# Altium PCB PCB_PB.pcbdoc
Units mil, origin at the board's own origin, x right, y up, seen from the top; angles counter-clockwise.
Board outline 2293.49 x 1790.24 mil, 2 copper layers (Top Layer, Bottom Layer); 45 components, 37 nets, 182 pads, 122 vias.
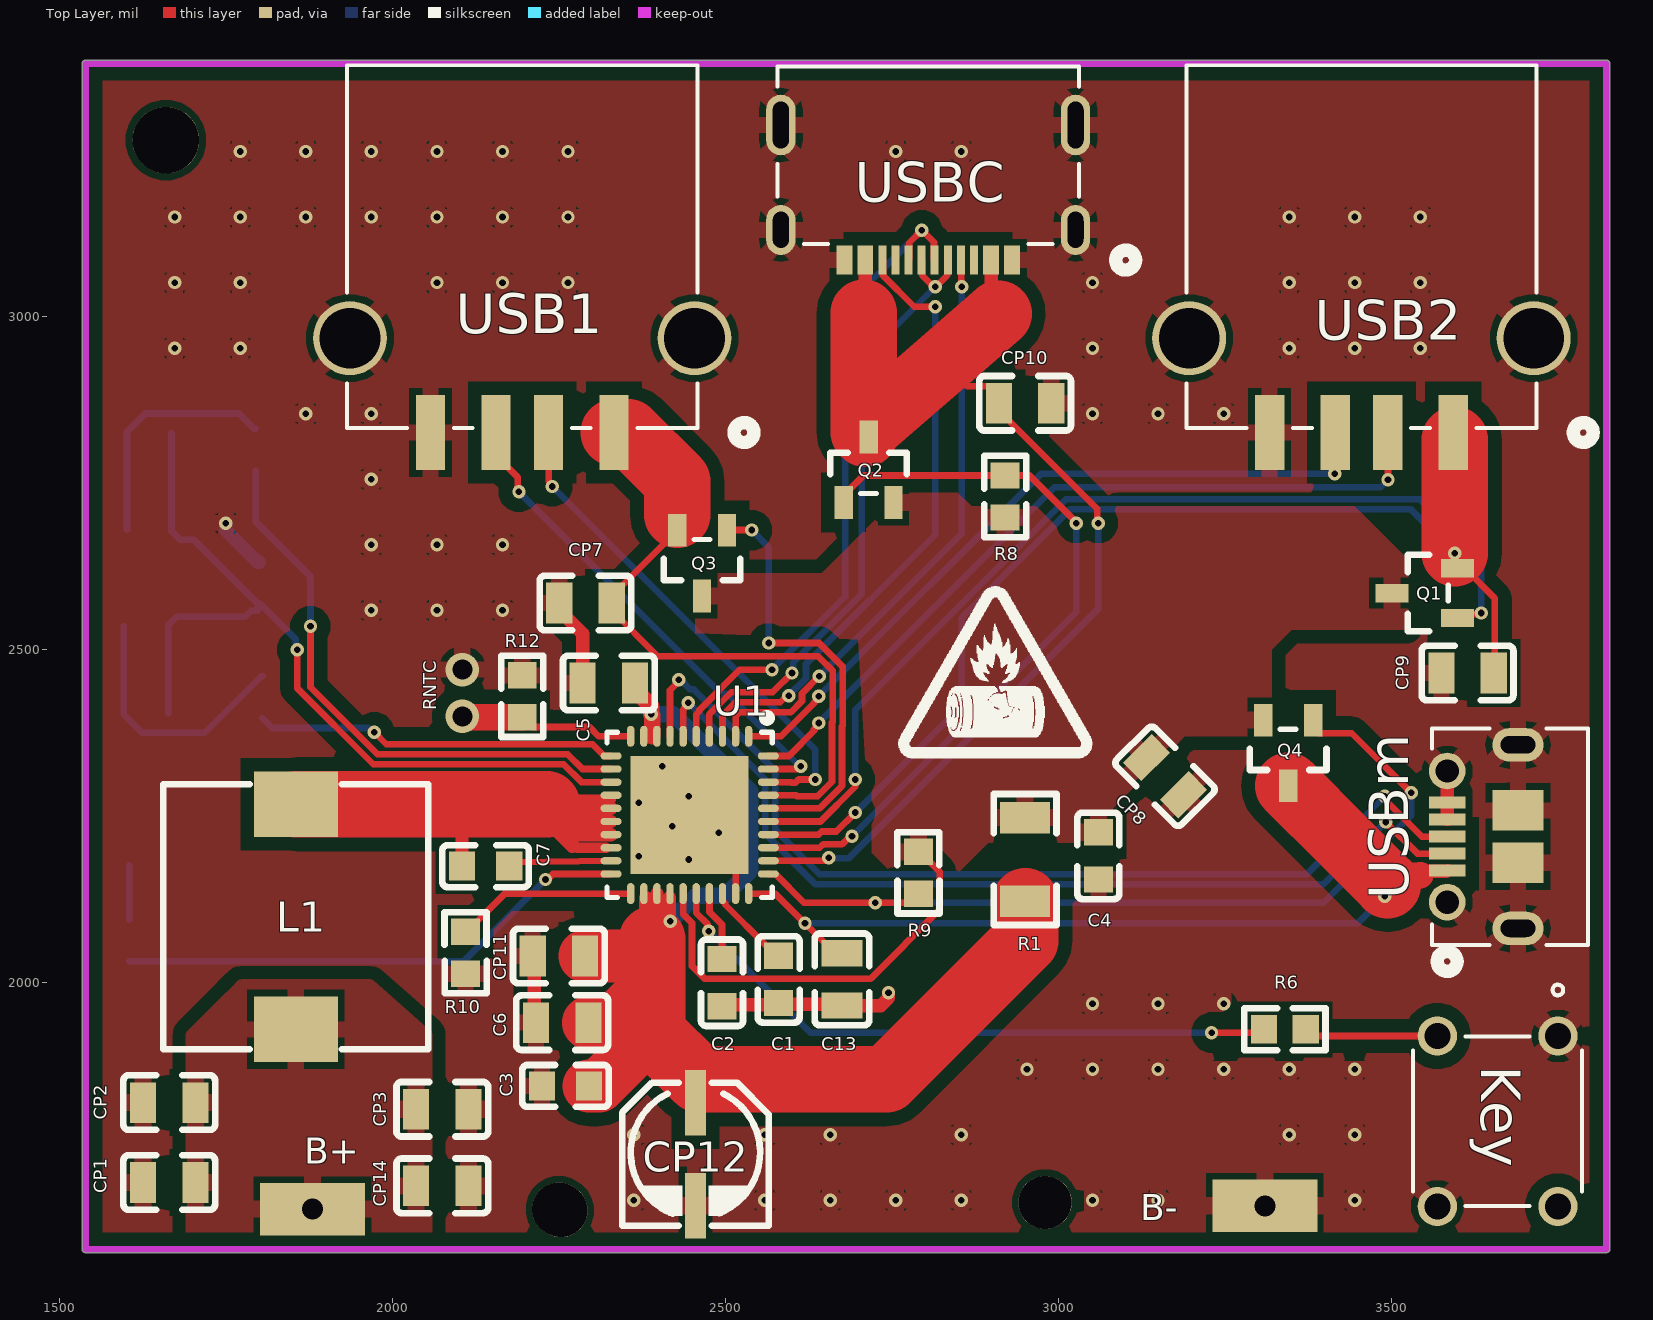
[diagram p0: Top Layer view]
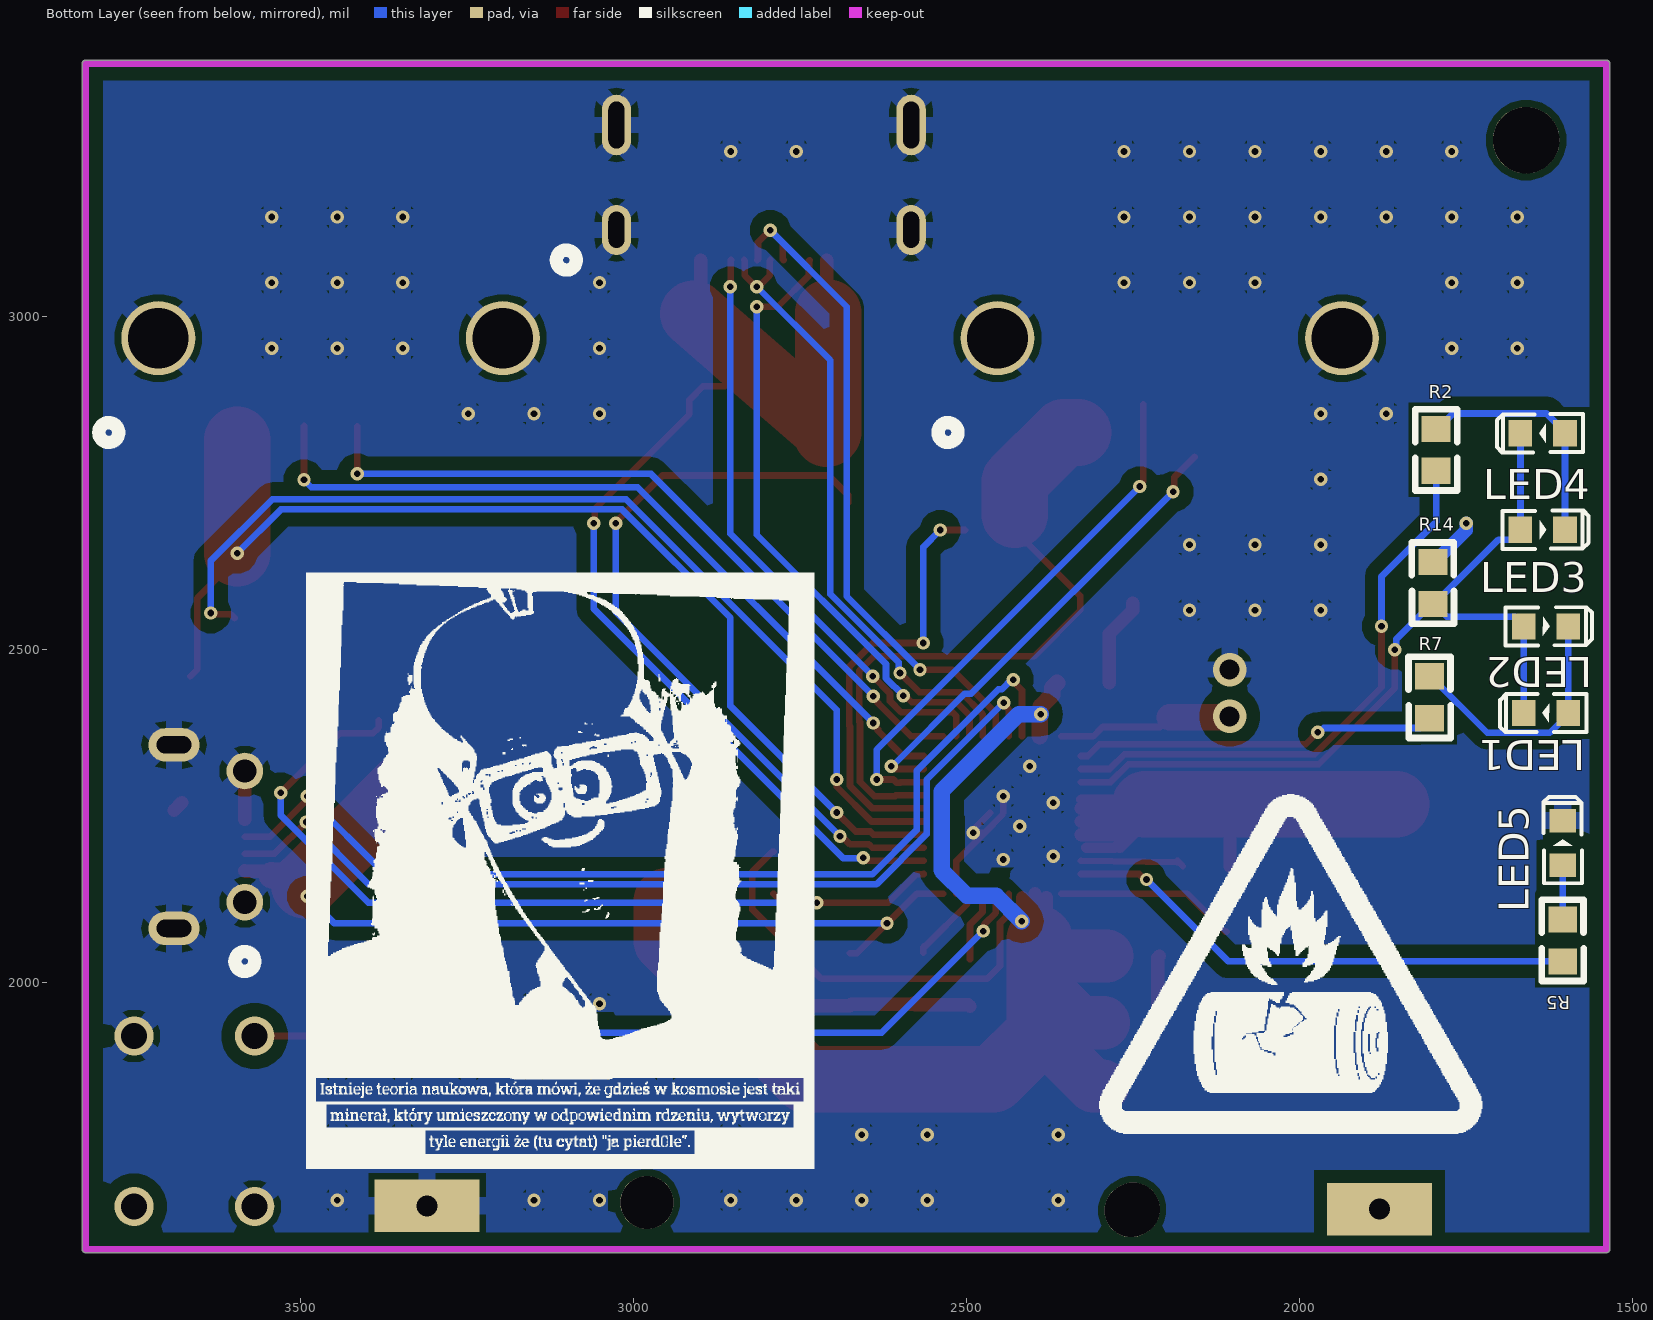
[diagram p1: Bottom Layer view, seen from below]

## Layer stack, top to bottom
Top Solder: solder mask 0.4, Solder Resist, Dk 3.5
Top Layer: signal copper 1.4
Dielectric1: dielectric 12.6, FR-4, Dk 4.8
Bottom Layer: signal copper 1.4
Bottom Solder: solder mask 0.4, Solder Resist, Dk 3.5

## Board outline
1539.37,1594.79 cw(c1539.37,1599.81) 1534.36,1599.81 1534.36,3380 cw(c1539.37,3380) 1539.37,3385.01 2004.03,3385.01 2004.45,3385.03 3822.83,3385 cw(c3822.83,3379.99) 3827.84,3379.99 3827.85,2603.72 3827.85,1599.81 cw(c3822.84,1599.81) 3822.84,1594.79

## Design rules (kind name [scope] priority, off if disabled: settings)
Clearance [All] p1: gap=5 ignorepadtopadclearanceinfootprint=FALSE except(10: Arc-Hole Track-Hole SMDPad-Hole THPad-Hole Via-Hole Fill-Hole Poly-Hole Region-Hole Text-Hole; 20: Arc-Poly Track-Poly SMDPad-Poly THPad-Poly Via-Poly Fill-Poly Poly-Poly)
ComponentClearance [All] p1: gap=10 collisioncheckmode=3 verticalgap=10 showdistances=FALSE donotcheckwithout3dbody=TRUE
MinimumSolderMaskSliver [OnLayer('Top Layer')] p1 off: minsoldermaskwidth=0
NetAntennae [InNet('GND')] p1: netantennaetolerance=0
PolygonConnect [All] p1: connectstyle=Relief reliefconductorwidth=25 reliefentries=4 polygonreliefangle="90 Angle" conductorbypadedge=TRUE mindistance=5 enablemindistance=TRUE airgapwidth=10
RoutingVias [All] p1: holewidth=28 width=50 viastyle="Through Hole" minholewidth=10 minwidth=10 maxholewidth=28 maxwidth=50
SilkToSilkClearance [All] p1: silktosilkclearance=2
SilkToSolderMaskClearance [IsPad] p1: minsilkscreentomaskgap=0 clearancetoexposedcopper=TRUE
SolderMaskExpansion [All] p1: expansion=4 istentingtop=FALSE
Width [All] p1: maxlimit=100 minlimit=10 preferedwidth=40 minimp=50.000000 maximp=50.000000 favimp=50.000000
25 further rules are at their usual default settings.

## Components (designator, comment, footprint, x,y, rotation, side; value= is the part's Value field where it differs from the comment)
C1 "2.2u/16V" C0603 2580,2005 r270 top
C2 "2.2u/16V" C0603 2495,2000 r270 top
C3 "100n/25V" C0603 2260,1845 r0 top
C4 "100n/25V" C0603 3060,2190.43 r270 top
C5 "22u/25V" C0805 2325,2450 r0 top
C6 "22u/25V" C0805 2255,1940 r0 top
C7 "100n/25V" C0603 2140,2175 r0 top
C13 "10uF/25V" C0805 2675,2005 r270 top
CP1 "22u/16V" C0805 1665,1700 r180 top
CP2 "22u/16V" C0805 1665,1820 r180 top
CP3 "22u/16V" C0805 2075,1810 r0 top
CP7 "10uF/25V" C0805 2290,2570 r180 top
CP8 "22u/25V" C0805 3160,2310 r315 top
CP9 "10uF/25V" C0805 3614.37,2465 r180 top
CP10 "10uF/25V" C0805 2950,2870 r180 top
CP11 "22u/25V" C0805 2250,2040 r0 top
CP12 "220u/25V" ?#1 2455,1665 r90 top
CP14 "22u/16V" C0805 2075,1695 r0 top
Key "Comment" TO_6050726_WRE 3750,1920 r270 top
L1 "2.2uH" INDUCTOR_SLF10145 1855,2099 r180 top
LED1 "LED-0603_B" LED0603_BLUE 1630,2405 r180 bottom
LED2 "LED-0603_B" LED0603_BLUE 1630,2535 r0 bottom
LED3 "LED-0603_B" LED0603_BLUE 1635,2680 r0 bottom
LED4 "LED-0603_B" LED0603_BLUE 1635,2825 r180 bottom
LED5 "LED-0603_G" LED0603_GREEN 1605,2210 r270 bottom
Q1 "RU207C" SOT-23-3_L2.9-W1.6-P1.90-LS2.8-BR 3550,2585 r0 top
Q2 "RU20P7C" SOT-23-3_L2.9-W1.3-P1.90-LS2.4-BR 2715,2770 r270 top
Q3 "RU207C" SOT-23-3_L2.9-W1.6-P1.90-LS2.8-BR 2465,2630 r90 top
Q4 "RU20P7C" SOT-23-3_L2.9-W1.3-P1.90-LS2.4-BR 3345,2345 r90 top
R1 "0.01R" R1206 2950,2185 r90 top
R2 "100R" R0603 1795,2800 r270 bottom
R5 "100R" R0603 1605,2063.51 r90 bottom
R6 "1k" R0603 3340,1930 r0 top
R7 "100R" R0603 1805,2428.51 r270 bottom
R8 "10k" R0603 2920,2730 r270 top
R9 "10K" R0603 2790,2165 r90 top
R10 "114K" R0603 2109.8,2045 r270 top
R12 "82k" R0603 2195,2430 r270 top
R14 "--" R0603 1800,2600 r270 bottom
U1 "IP5328P" QFN-40_L6.0-W6.0-P0.50-BL-EP 2446.42,2251.89 r180 top
USB1 "Comment" CONN4_DS1095-BNM0_CFL#1 2195,3105 r180 top
USB2 "Comment" CONN4_DS1095-BNM0_CFL#2 3455,3105 r180 top
USBC "Comment" CONN12_USB4520-03-0-A_GCT 2804.49,3242.43 r180 top
USBm "Comment" CONN_1050170001_MOL 3677.98,2219.37 r90 top
? "" ?#2 2680,1430 r0 top

## Footprints (in the part's own frame and the unit in brackets; to place one, negate y for a bottom-side part, rotate by r counter-clockwise, add the part's x,y. Pads: shape width x height; smd on the part's side, far side on the other; paste and mask are expansions set on the pad)
C0603 [mm]
  rect 1x1.1 smd paste+0 mask+0.102: 1(-0.9,0) 2(0.9,0)
  silkscreen extent -1.65,-0.8 1.65,0.8
C0805 [mm]
  rect 1x1.55 smd paste+0 mask+0.102: 1(-1,0) 2(1,0)
  silkscreen extent -1.75,-1.04 1.75,1.04
CONN4_DS1095-BNM0_CFL#1 [mil]
  rect 44x113 smd paste+0 mask+4: 1(-137.8,278.96) 2(-39.37,278.96) 4(137.8,278.96)
  rect 44x113 smd paste-56.5 mask+4: 3(39.37,278.96)
  round 111 / inner round 60 / far side round 111 hole 91 paste-99999 mask-55.5: 5(-258.66,137.22) 6(258.66,137.22)
  silkscreen extent -348,-273 263,294
CONN4_DS1095-BNM0_CFL#2 [mil]
  rect 44x113 smd paste+0 mask+4: 1(-137.8,278.96) 2(-39.37,278.96) 3(39.37,278.96) 4(137.8,278.96)
  round 111 / inner round 60 / far side round 111 hole 91 paste-99999 mask-55.5: 5(-258.66,137.22) 6(258.66,137.22)
  silkscreen extent -348,-273 263,294
CONN12_USB4520-03-0-A_GCT [mil]
  rect 24x43 smd paste+0 mask+2: 1(-125.98,157.43) 2(-94.49,157.43) 11(94.49,157.43) 12(125.98,157.43)
  rect 12x43 smd paste+0 mask+2: 3(-68.9,157.43) 4(-49.21,157.43) 5(-29.53,157.43) 6(-9.84,157.43) 7(9.84,157.43) 8(29.53,157.43) 9(49.21,157.43) 10(68.9,157.43)
  oval 44x75 / inner round 60 / far side oval 44x75 hole 24 slot 50 at 90 deg paste-99999 mask+0: 13(-221.26,112.15)
  oval 44x75 hole 24 slot 53 at 90 deg paste-99999 mask+0: 14(221.26,112.15)
  oval 44x91 / inner round 60 / far side oval 44x91 hole 24 slot 70 at 90 deg paste-99999 mask+0: 15(-221.26,-45.33) 16(221.26,-45.33)
  round 24 / inner round 60 / far side round 24 hole 24 unplated paste-99999 mask-12: 17(-221.26,127.65) 18(-221.26,96.65) 19(221.26,127.65) 20(221.26,96.65) 21(-221.26,-21.83) 22(-221.26,-68.83) 23(221.26,-21.83) 24(221.26,-68.83)
  Multi-Layer lines w24: 221.26,127.65 221.26,96.65 ; 221.26,-21.83 221.26,-68.83 ; -221.26,127.65 -221.26,96.65 ; -221.26,-21.83 -221.26,-68.83
  silkscreen extent -312,-133 227,172
CONN_1050170001_MOL [mil]
  rect 18x55 smd paste+0 mask+0: 1(-51.18,94.28) 2(-25.59,94.28) 3(0,94.28) 4(25.59,94.28) 5(51.18,94.28)
  rect 61x77 smd paste+0 mask+4: 6(-39.37,-12.02) 7(39.37,-12.02)
  round 55 / inner round 60 / far side round 55 hole 35 paste-99999 mask+0: 8(-98.43,94.28) 9(98.43,94.28)
  oval 50x77 / inner round 60 / far side oval 50x77 hole 26 slot 50 at 90 deg paste-99999 mask+0: S_1(-137.8,-12.02) S_2(137.8,-12.02)
  round 26 / inner round 60 / far side round 26 hole 26 unplated paste-99999 mask-13: S_1_H1(-137.8,1.48) S_1_H2(-137.8,-25.52) S_2_H1(137.8,1.48) S_2_H2(137.8,-25.52)
  Multi-Layer lines w26: -137.8,1.48 -137.8,-25.52 ; 137.8,1.48 137.8,-25.52
  silkscreen extent -202,-117 162,117
INDUCTOR_SLF10145 [mil]
  rect 126x98.4 smd paste+0 mask+4: 1(0,169) 2(0,-169)
  silkscreen extent -199,-199 199,199
LED0603_BLUE [mm]
  rect 0.9x1 smd paste+0 mask+0.102: 1(0.85,0) 2(-0.85,0)
  silkscreen extent -1.75,-0.73 1.54,0.73
LED0603_GREEN [mm]
  rect 0.9x1 smd paste+0 mask+0.102: 1(0.85,0) 2(-0.85,0)
  silkscreen extent -1.75,-0.73 1.54,0.73
QFN-40_L6.0-W6.0-P0.50-BL-EP [mm]
  oval 0.28x0.8 smd paste+0 mask+0.102: 1(-2.25,-3) 2(-1.75,-3) 3(-1.25,-3) 4(-0.75,-3) 5(-0.25,-3) 6(0.25,-3) 7(0.75,-3) 8(1.25,-3) 9(1.75,-3) 10(2.25,-3) 21(2.25,3) 22(1.75,3) 23(1.25,3) 25(0.25,3) 26(-0.25,3) 27(-0.75,3) 28(-1.25,3) 29(-1.75,3) 30(-2.25,3)
  oval 0.8x0.28 smd paste+0 mask+0.102: 11(3,-2.25) 12(3,-1.75) 13(3,-1.25) 14(3,-0.75) 15(3,-0.25) 16(3,0.25) 17(3,0.75) 18(3,1.25) 19(3,1.75) 20(3,2.25) 31(-3,2.25) 32(-3,1.75) 33(-3,1.25) 34(-3,0.75) 35(-3,0.25) 36(-3,-0.25) 37(-3,-0.75) 38(-3,-1.25) 39(-3,-1.75) 40(-3,-2.25)
  oval 0.28x0.8 smd paste+0 mask+0.076: 24(0.75,3)
  rect 4.5x4.5 smd paste+0 mask+0.102: 41(0,0)
  silkscreen extent -3.15,-3.85 3.15,3.15
R0603 [mm]
  rect 1x1.1 smd paste+0 mask+0.102: 1(-0.8,0) 2(0.8,0)
  silkscreen extent -1.55,-0.8 1.55,0.81
R1206 [mm]
  rect 1.2x1.9 smd paste+0 mask+0.102: 1(-1.6,0) 2(1.6,0)
  silkscreen extent -2.5,-1.2 2.5,1.2
SOT-23-3_L2.9-W1.3-P1.90-LS2.4-BR [mm]
  rect 1.25x0.7 smd paste+0 mask+0.102: 1(1.25,-0.95) 2(1.25,0.95) 3(-1.25,0)
  silkscreen extent -0.65,-1.46 0.9,1.46
SOT-23-3_L2.9-W1.6-P1.90-LS2.8-BR [mm]
  rect 1.25x0.7 smd paste+0 mask+0.102: 1(1.25,-0.95) 2(1.25,0.95) 3(-1.25,0)
  silkscreen extent -0.65,-1.46 0.9,1.46
TO_6050726_WRE [mil]
  round 59 / inner round 60 / far side round 59 hole 39 paste-99999 mask+0: 1(0,0) 2(0,-181.1) 3(255.91,0) 4(255.91,-181.1)
  silkscreen extent -77,-218 255,36
?#1 [mm]
  rect 2.5x0.8 smd paste+0 mask+0.102: 1(3.937,0) 2(0,0)
  silkscreen extent -0.76,-2.79 4.7,2.79
?#2 [mm]

## Free pads (board coordinates)
  rect 157.48x78.74 hole 31.5 paste-99999 mask+4: 1(1880,1660) 1(3310,1665)
  round 100 hole 100 unplated paste-99999: 3(1660,3265)
  round 80 hole 80 unplated paste-99999: ""(2250,1660) ""(2253.05,1657.92) ""(2980,1670)

## Via types
v1: diameter 20, hole 10, Top Layer to Bottom Layer, 120 vias
v2: diameter 50, hole 30, Top Layer to Bottom Layer, 2 vias

## Nets (pads, with @x,y where several pads share a name; then routed paths per layer and width w, separated by ;. In a path a pad name is that pad's centre, name@x,y a point inside that pad or via, vN(x,y) a via of type N, cw(c..) or ccw(c..) an arc to the next point about the centre after c; other vN are vias at no path point)
C1_1: C1.1 U1.28 | length 118
  Top Layer w10: U1.28 2495.63,2123.27 2499.81,2119.09 2499.81,2117.12 2561.81,2055.12 2563.35,2055.12 2565,2053.46 C1.1@2565,2045.43
C2_1: C2.1 U1.27 | length 106.2
  Top Layer w10: U1.27 2476.15,2133.58 2476.15,2106.13 2495,2087.28 C2.1
CC1: U1.2 USBC.4 | length 901.4
  Top Layer w10: U1.2 2515.32,2400.14 2521.18,2406 2598.28,2406 2615,2422.72 2615,2434.25 v1(2641,2460.25) ; USBC.4 2854.35,3084.35 2854.35,3045.65 v1(2855,3045)
  Bottom Layer w10: v1(2641,2460.25) 2855,2674.25 v1(2855,3045)
CC2: U1.3 USBC.10 | length 939.6
  Top Layer w10: U1.3 2495.63,2401.67 2514.96,2421 2582.29,2421 2592.29,2431 v1(2595,2431) ; USBC.10@2735.54,3084.95 2736.59,3083.9 2736.59,3062.04 2783.63,3015 v1(2815,3015)
  Bottom Layer w10: v1(2595,2431) 2621,2457 2621,2478.57 2815,2672.57 v1(2815,3015)
DMA1: U1.38 USB1.2 | length 802.1
  Top Layer w10: USB1.2@2235,2868.43 2235,2752.71 2240,2747.71 v1(2240,2745) ; U1.38 2598.8,2301.1 2599.9,2300 2605,2300 2610,2305 v1(2635,2305)
  Bottom Layer w10: v1(2240,2745) 2635,2350 v1(2635,2305)
DMA2: U1.40 USB2.2 | length 1186.3
  Top Layer w10: U1.40 2595.28,2340.47 2633.09,2378.28 2633.09,2380.38 2640,2387.29 v1(2640,2390) ; USB2.2@3494.37,2836.04 3495,2835.41 v1(3495,2755)
  Bottom Layer w10: v1(2640,2390) 2994,2744 3484,2744 v1(3495,2755)
DMB: U1.6 USBm.2 | length 1412.4
  Top Layer w10: U1.6 2436.58,2410.06 2444.29,2417.77 v1(2444.29,2420.47) ; v1(3491.36,2241.36) 3538.94,2193.78 USBm.2
  Bottom Layer w10: v1(2444.29,2420.47) 2560,2304.76 2560,2223.18 2635.5,2147.68 3397.68,2147.68 v1(3491.36,2241.36)
DMC: U1.4 USBC.5 USBC.7 | length 950.1
  Top Layer w10: U1.4 2475.95,2403.2 2508.75,2436 2571,2436 v1(2600,2465) ; USBC.7 2795.65,3084 2795.65,3062.04 2812.69,3045 2815.97,3045 2833.02,3062.04 2833.02,3084 USBC.5
  Bottom Layer w10: v1(2600,2465) 2601.91,2466.91 2601.91,2480.7 2704.75,2583.54 2704.75,2934.75 v1(2815,3045)
DPA1: U1.39 USB1.3 | length 698.9
  Top Layer w10: USB1.3@2157.83,2789.34 2188.09,2759.09 2188.09,2738.93 v1(2190,2737.02) ; U1.39 2606.06,2320.79 2610.37,2325.1 v1(2613.08,2325.1)
  Bottom Layer w10: v1(2190,2737.02) 2493.01,2434 2502.74,2434 2605,2331.74
DPA2: U1.1 USB2.3 | length 1116.7
  Top Layer w10: U1.1 2583.5,2370 2633.09,2419.59 2633.09,2420.38 2640,2427.29 v1(2640,2430) ; v1(3415,2764) USB2.3@3415,2835.41
  Bottom Layer w10: v1(2640,2430) 2974,2764 v1(3415,2764)
DPB: U1.7 USBm.3 | length 1493.8
  Top Layer w10: U1.7 2416.89,2439.18 2430,2452.29 v1(2430,2455) ; v1(3490,2280) 3491.91,2278.09 3491.91,2273.09 3545.63,2219.37 USBm.3
  Bottom Layer w10: v1(2430,2455) 2432.71,2455 2447.23,2440.47 2452.57,2440.47 2575,2318.04 2575,2229.4 2641.72,2162.68 3372.68,2162.68 v1(3490,2280)
DPC: U1.5 USBC.6 USBC.8 | length 1024.7
  Top Layer w10: U1.5 2456.26,2402.98 2460.95,2407.67 2460.95,2409.41 2521.54,2470 v1(2570,2470) ; USBC.8 2775.96,3086 2775.96,3110.96 v1(2795,3130) ; 2802.28,3122.72 2813.33,3111.67 2813.33,3086 USBC.6
  Bottom Layer w10: v1(2570,2470) 2680,2580 2680,3015 v1(2795,3130)
GND: C1.2 C2.2 C3.1 C4.2 C5.1 C6.1 C13.2 CP1.2 CP2.2 CP3.2 CP7.2 CP8.2 CP9.2 CP10.1 CP11.1 CP12.2 CP14.2 Key.1 Key.4 LED5.2 pad.1@3310,1665 R10.2 R12.1 R14.1 U1.29 U1.41 USB1.4 USB1.5 USB1.6 USB2.4 USB2.5 USB2.6 USBC.1 USBC.12 USBC.13 USBC.14 USBC.15 USBC.16 USBm.4 USBm.5 USBm.6 USBm.7 USBm.8 USBm.9 USBm.S_1 USBm.S_2 | length 901.4
  Top Layer w10: U1.41@2445,2255 v1(2445,2280) ; U1.41 U1.41@2473.31,2225 ; U1.41@2465,2255 2490,2230 v1(2490,2225) U1.41@2473.31,2225 ; U1.29 2515.32,2182.99 U1.41@2473.31,2225
  Top Layer w20: CP11.1 2213.13,2037.5 2213.13,1942.5 C6.1 ; CP7.2 2250.63,2559.17 2285.63,2524.17 C5.1 ; C2.2 2497.5,1967.07 2577.5,1967.07 C1.2 2581.97,1967.6 2673.03,1967.6 C13.2 2733.28,1965.63 2745,1977.35 v1(2745,1985) ; USBm.4 USBm.5 USBm.9 ; USBm.7@3678.19,2270.55 USBm.7
  Bottom Layer w20: v1(1750,2690) 1750,2679.52 1798.03,2631.49 R14.1
  other v1: 2362.2,1673.23 2559.06,1673.23 2657.48,1673.23 2755.91,1673.23 2854.33,1673.23 3051.18,1673.23 3149.61,1673.23 3444.88,1673.23 2362.2,1771.65 2559.06,1771.65 2657.48,1771.65 2854.33,1771.65 3346.46,1771.65 3444.88,1771.65 2952.76,1870.08 3051.18,1870.08 3149.61,1870.08 3248.03,1870.08 3346.46,1870.08 3444.88,1870.08 3051.18,1968.5 3149.61,1968.5 3248.03,1968.5 2445,2185 2370,2190 2420,2235 2370,2270 2405,2325 1968.5,2559.06 2066.93,2559.06 2165.35,2559.06 1968.5,2657.48 2066.93,2657.48 2165.35,2657.48 1968.5,2755.91 1870.08,2854.33 1968.5,2854.33 3051.18,2854.33 3149.61,2854.33 3248.03,2854.33 1673.23,2952.76 1771.65,2952.76 3051.18,2952.76 3346.46,2952.76 3444.88,2952.76 3444.88,2952.76 3543.31,2952.76 1673.23,3051.18 1771.65,3051.18 2066.93,3051.18 2165.35,3051.18 2263.78,3051.18 3051.18,3051.18 3346.46,3051.18 3444.88,3051.18 3543.31,3051.18 1673.23,3149.61 1771.65,3149.61 1870.08,3149.61 1968.5,3149.61 2066.93,3149.61 2165.35,3149.61 2263.78,3149.61 3346.46,3149.61 3444.88,3149.61 3543.31,3149.61 1771.65,3248.03 1870.08,3248.03 1968.5,3248.03 2066.93,3248.03 2165.35,3248.03 2263.78,3248.03 2755.91,3248.03 2854.33,3248.03
  other v2: 2105,2470
KEY: R6.1 U1.26 | length 969
  Top Layer w10: U1.26 2456.26,2104.81 2473.09,2087.98 2473.09,2079.41 v1(2475,2077.5) ; v1(3230,1925) 3303.51,1925 R6.1
  Bottom Layer w10: v1(2475,2077.5) 2627.5,1925 v1@3236.19,1925
LED1: R7.2 U1.11 | length 546.7
  Top Layer w10: v1(1972.95,2375.93) 1990.89,2358 2300.54,2358 2318.07,2340.47 U1.11
  Bottom Layer w10: R7.2 1819.68,2382.33 1963.85,2382.33 1970.25,2375.93 v1(1972.95,2375.93)
LED2: R2.2 U1.12 | length 861
  Top Layer w10: v1(1877.02,2535) 1877.02,2443.59 1977.6,2343 2263.07,2343 2285.28,2320.79 U1.12
  Bottom Layer w10: R2.2 1795,2691.97 1877.02,2609.96 v1(1877.02,2535)
LED3: LED1.2 LED2.1 LED3.1 LED4.2 R14.2 U1.13 | length 1288.1
  Top Layer w10: v1(1857.02,2500) 1857.02,2442.37 1971.39,2328 2256.85,2328 2283.75,2301.1 U1.13
  Bottom Layer w10: LED1.2 1663.47,2536.97 1676.18,2549.68 1779.21,2549.68 1788.03,2558.51 1798.03,2558.51 1798.03,2568.51 1701.22,2665.32 1681.18,2665.32 1668.47,2678.03 LED4.2 ; R14.2 1801.97,2568.51 1855.1,2515.37 1855.1,2501.91 v1(1857.02,2500)
LIGHT: R5.1 U1.20 | length 777.7
  Top Layer w10: v1(2230,2155) 2232.71,2155 2241.02,2163.31 U1.20
  Bottom Layer w10: R5.1 2107.01,2032.01 v1(2230,2155)
R2_1: LED3.2 LED4.1 R2.1 | length 361.5
  Bottom Layer w10: LED3.2 LED4.1 1601.53,2826.97 1629.25,2854.68 1769.84,2854.68 1793.03,2831.49 R2.1
R5_2: LED5.1 R5.2 | length 81.5
  Bottom Layer w10: R5.2 LED5.1
R6_2: Key.2 R6.2 | length 201.5
  Top Layer w10: R6.2 3381.49,1920 Key.2
R7_1: LED1.1 LED2.2 R7.1 | length 387
  Bottom Layer w10: LED2.2 1596.53,2403.03 1624.25,2375.32 1718.35,2375.32 1803.03,2460 R7.1
R10_1: R10.1 U1.21 | length 271.8
  Top Layer w10: R10.1 2111.77,2076.49 2169.06,2133.78 U1.21
RNTC1_2: R12.2 U1.10 | length 265.3
  Top Layer w10: R12.2 2209.68,2383.82 2295.94,2383.82 2309.76,2370 U1.10
  Top Layer w40: v2(2105,2400) 2106.18,2398.82 2194.68,2398.82 R12.2
U1_14: C7.1 L1.2 U1.14 U1.15 U1.16 U1.17 U1.18 | length 978.5
  Top Layer w15: 2245.42,2275.42 2328.31,2275.42
  Top Layer w16: 2270,2210 2277.32,2202.68 U1.18@2320.56,2202.68
  Top Layer w20: 2070,2268 2104.57,2233.43 C7.1 ; 2245.42,2281.42 2232,2268 ; 2270,2205 2232,2243 2232,2268 ; U1.17 2277.64,2222.36 2232,2268 ; U1.16 2279.68,2242.05 2260,2261.73 U1.15
  Top Layer w100: L1.2 2070,2268 2232,2268
U1_19: C7.2 U1.19 | length 156.2
  Top Layer w10: C7.2 C7.2@2183.42,2182.99 ; C7.2@2183.42,2180.99 U1.19
VBAT+: CP1.1 CP2.1 CP3.1 CP14.1 L1.1 pad.1@1880,1660
VBUS: CP10.2 Q2.3 U1.32 USBC.2 USBC.11 | length 1717.9
  Top Layer w10: U1.32 2647.6,2182.99 2652.29,2187.68 v1(2655,2187.68) ; 2826.75,2931.69 2862.93,2895.51 2895.95,2895.51 2916.31,2875.15 2916.31,2853.49 3058.09,2711.72 3058.09,2691.91 v1(3060,2690)
  Top Layer w20: 2707.86,3005.92 2710,3008.05 USBC.11 ; 2898.98,3033.98 USBC.2
  Top Layer w100: 2707.86,3005.92 2707.86,2826.34 Q2.3@2710,2824.2 ; Q2.3@2710,2830 2826.75,2931.69 2910,3004.2
  Bottom Layer w10: v1(2655,2187.68) 2655.96,2186.72 2685,2186.72 3060,2561.72 v1(3060,2690)
VBUSG: Q2.1 R8.1 U1.33 | length 1145.1
  Top Layer w10: U1.33 2641.72,2202.68 2646.72,2207.68 2674.97,2207.68 2687.29,2220 v1(2690,2220) ; Q2.1 2677.6,2731.63 2707.47,2761.49 R8.1 2956.65,2761.49 3027.01,2691.14 v1(3027.01,2690)
  Bottom Layer w10: v1(2690,2220) 3027.01,2557.01 v1(3027.01,2690)
VIN: C13.1 Q4.3 U1.30 USBm.1 | length 1419.1
  Top Layer w10: U1.30 2574.76,2133.78 2664.17,2044.37 C13.1 ; 3405,2190 3427.9,2212.9
  Top Layer w20: 3543.56,2158.56 3552.19,2167.19 3582.7,2167.19 USBm.1
  Top Layer w40: v1(3490,2130) 3515.79,2159.63 3543.56,2161.56
  Top Layer w100: Q4.3 3427.9,2212.9 3494.15,2146.65
  Bottom Layer w10: v1(2619.47,2089.07) 3449.07,2089.07 v1(3490,2130)
VING: Q4.1 R9.1 U1.31 | length 1344.8
  Top Layer w10: U1.31 2564.86,2162.98 2575.1,2162.98 2618.08,2120 2720.38,2120 2725,2124.62 2729.62,2120 2776.49,2120 R9.1 ; Q4.1 3382.4,2383.37 3391.18,2374.59 3440.41,2374.59 v1(3530,2285)
  Bottom Layer w10: v1(2725,2120) 3398.28,2120 3530,2251.72 v1(3530,2285)
VMID: C4.1 CP8.1 Q1.3 Q2.2 Q3.3 Q4.2 R1.2 R8.2 R9.2 U1.25 | length 638.1
  Top Layer w10: U1.25 2436.58,2103.27 2450,2089.85 2450,2024.95 2469.2,2005.75 2717.72,2005.75 2821.65,2109.68 2821.65,2166.81 2791.97,2196.49 R9.2
VOUT1: CP7.1 Q3.2 U1.37 USB1.1 | length 1007.1
  Top Layer w10: Q3.2@2427.6,2702.4 2421.41,2696.21 2421.41,2662.19 2418.82,2659.59 2408.14,2659.59 2329.37,2580.83 2329.37,2559.17 2398.54,2490 2639.54,2490 2661,2468.54 2661,2391.84 2660,2390.84 2660,2301.72 2638.28,2280 2607.47,2280 2606.05,2281.42 U1.37
  Top Layer w100: USB1.1 2354.3,2826.04 2427.6,2752.74 Q3.2@2427.6,2702.4
VOUT1G: Q3.1 U1.36 | length 647.2
  Top Layer w10: Q3.1 2502.8,2679.6 v1(2539.6,2679.6) ; U1.36 2641.23,2261.73 2675,2295.5 2675,2384.63 2676,2385.63 2676,2474.75 2640.75,2510 v1(2565,2510)
  Bottom Layer w10: v1(2539.6,2679.6) 2565,2654.2 v1(2565,2510)
VOUT2: CP9.1 Q1.2 U1.34 USB2.1 | length 1792
  Top Layer w10: U1.34 2640.18,2222.36 2644.87,2227.05 2666.55,2227.05 v1(2695.14,2255.64) ; v1@3593.57,2638.86 3593.57,2631.18 3596.75,2628 Q1.2@3604.43,2628 ; v1(3595,2645) 3571.91,2645 3571.91,2638.86 3582.77,2628 3599.2,2628 Q1.2@3599.2,2620.8 ; Q1.2 3610.03,2622.4 3655,2577.43 3655,2470.63 CP9.1@3665.63,2460
  Top Layer w100: v1(3595,2645) USB2.1@3595,2815
  Bottom Layer w10: v1(2695.14,2255.64) 2854.71,2415.21 2854.71,2547.99 3017.36,2710.65 3529.35,2710.65 v1(3595,2645)
VOUT2G: Q1.1 U1.35 | length 1493.7
  Top Layer w10: U1.35 2642.76,2242.05 2695,2294.29 v1(2695,2305) ; Q1.1 3604.69,2553.09 3633.09,2553.09 v1(3635,2555)
  Bottom Layer w10: v1(2695,2305) 2695,2409.5 3011.15,2725.65 3542.64,2725.65 3635,2633.28 v1(3635,2555)
VSYS: C3.2 C5.2 C6.2 CP11.2 CP12.1 R1.1 U1.8 U1.9 U1.22 U1.23 U1.24 | length 1899.4
  Top Layer w20: 2380.52,2077.48 U1.22@2380.52,2128.03 ; 2390,2065 2397.21,2072.21 U1.23 ; U1.24@2416.07,2128.03 2416.07,2093.7 v1(2417.38,2092.38)
  Top Layer w25: C5.2 2371.55,2442.82 2371.55,2431.99 2388.52,2415.02 v1(2388.52,2403.01) 2390.21,2401.32 2390.21,2370
  Top Layer w80: CP11.2 2350,2040 ; C6.2 2330,1940 2390,2000 ; C3.2 2310,1845 2390,1925
  Top Layer w100: 2390,2065 2390,2000 2390,1925 2460,1855 2741.92,1855 2950,2063.08 R1.1
  Bottom Layer w25: v1(2388.52,2403.01) 2421.99,2403.01 2537.5,2287.5 2537.5,2168.61 2499.45,2130.55 2455.55,2130.55 v1@2417.5,2092.5
pads on no net: Key.3 USBC.3 USBC.9 USBC.17 USBC.18 USBC.19 USBC.20 USBC.21 USBC.22 USBC.23 USBC.24 USBm.S_1_H1 USBm.S_1_H2 USBm.S_2_H1 USBm.S_2_H2

## Polygon pours and split planes (outlines as drawn)
GND on Top Layer "U1_14" (solid, remove dead copper, pour order 5): 1550,3370 1545,3365 1545,1620 3805,1620 3805,3365
VMID on Top Layer "U1_14" (solid, pour order 3): 3190,2370 3320,2370 3320,2500 3350,2530 3525,2530 3525,2635 3445,2715 2870,2715 2835,2750 2735,2750 2735,2705 2645,2615 2455,2615 2455,2524.9 2699.72,2514.91 2710,2335 2720,2325 2720,2195 2750,2165 2850,2165 2895,2210 3030,2210
VBAT+ on Top Layer "U1_14" (solid, pour order 2): 1690,1610 2060,1610 2060,1925 1970,2005 1770,2005 1760,1995 1690,1925
GND on Bottom Layer "U1_14" (solid, remove dead copper, pour order 4): 1528.16,3362.33 1535.98,1610.15 3795.98,1610.15 3795.98,3335.15 3795.98,3362.33

## Keep-outs
Keep-Out Layer:
  lines w10: 2018.91,3380 1539.37,3380 1539.37,3134.37 1539.37,2992.79 1539.37,2072.25 1539.37,1599.81 2681.1,1599.81 3822.84,1599.81 3822.83,1934.44 3822.83,2603.72 3822.83,3379.99 2004.45,3380.02 ; 2004.45,3380 2004.45,3380.02

## Silkscreen, mask and mechanical layers (free items; w line width, h text height)
Top Overlay:
  drawing of 3 lines, arcs and shapes, not listed
  text "RNTC" at 2066.04,2408.96 h20 r90
  text "B+" at 1868,1728 h39.37
  text "B-" at 3123,1643 h39.37
Bottom Overlay:
  drawing of 241 lines, arcs and shapes, not listed

## Dimensions
2561.23,3380.43 to 3047.75,3380.43 on Document
1870,3390 to 2519.16,3382.5 on Document
3845,3380 to 3815,1605 on Document